# Altium PCB Copy of BQ76952_test_board.PcbDoc
Units mm, origin at the board's own origin, x right, y up, seen from the top; angles counter-clockwise.
Board outline 66.75 x 70 mm, 2 copper layers (Top Layer, Bottom Layer), stack 1.571 mm thick; 79 components, 70 nets, 228 pads, 109 vias.
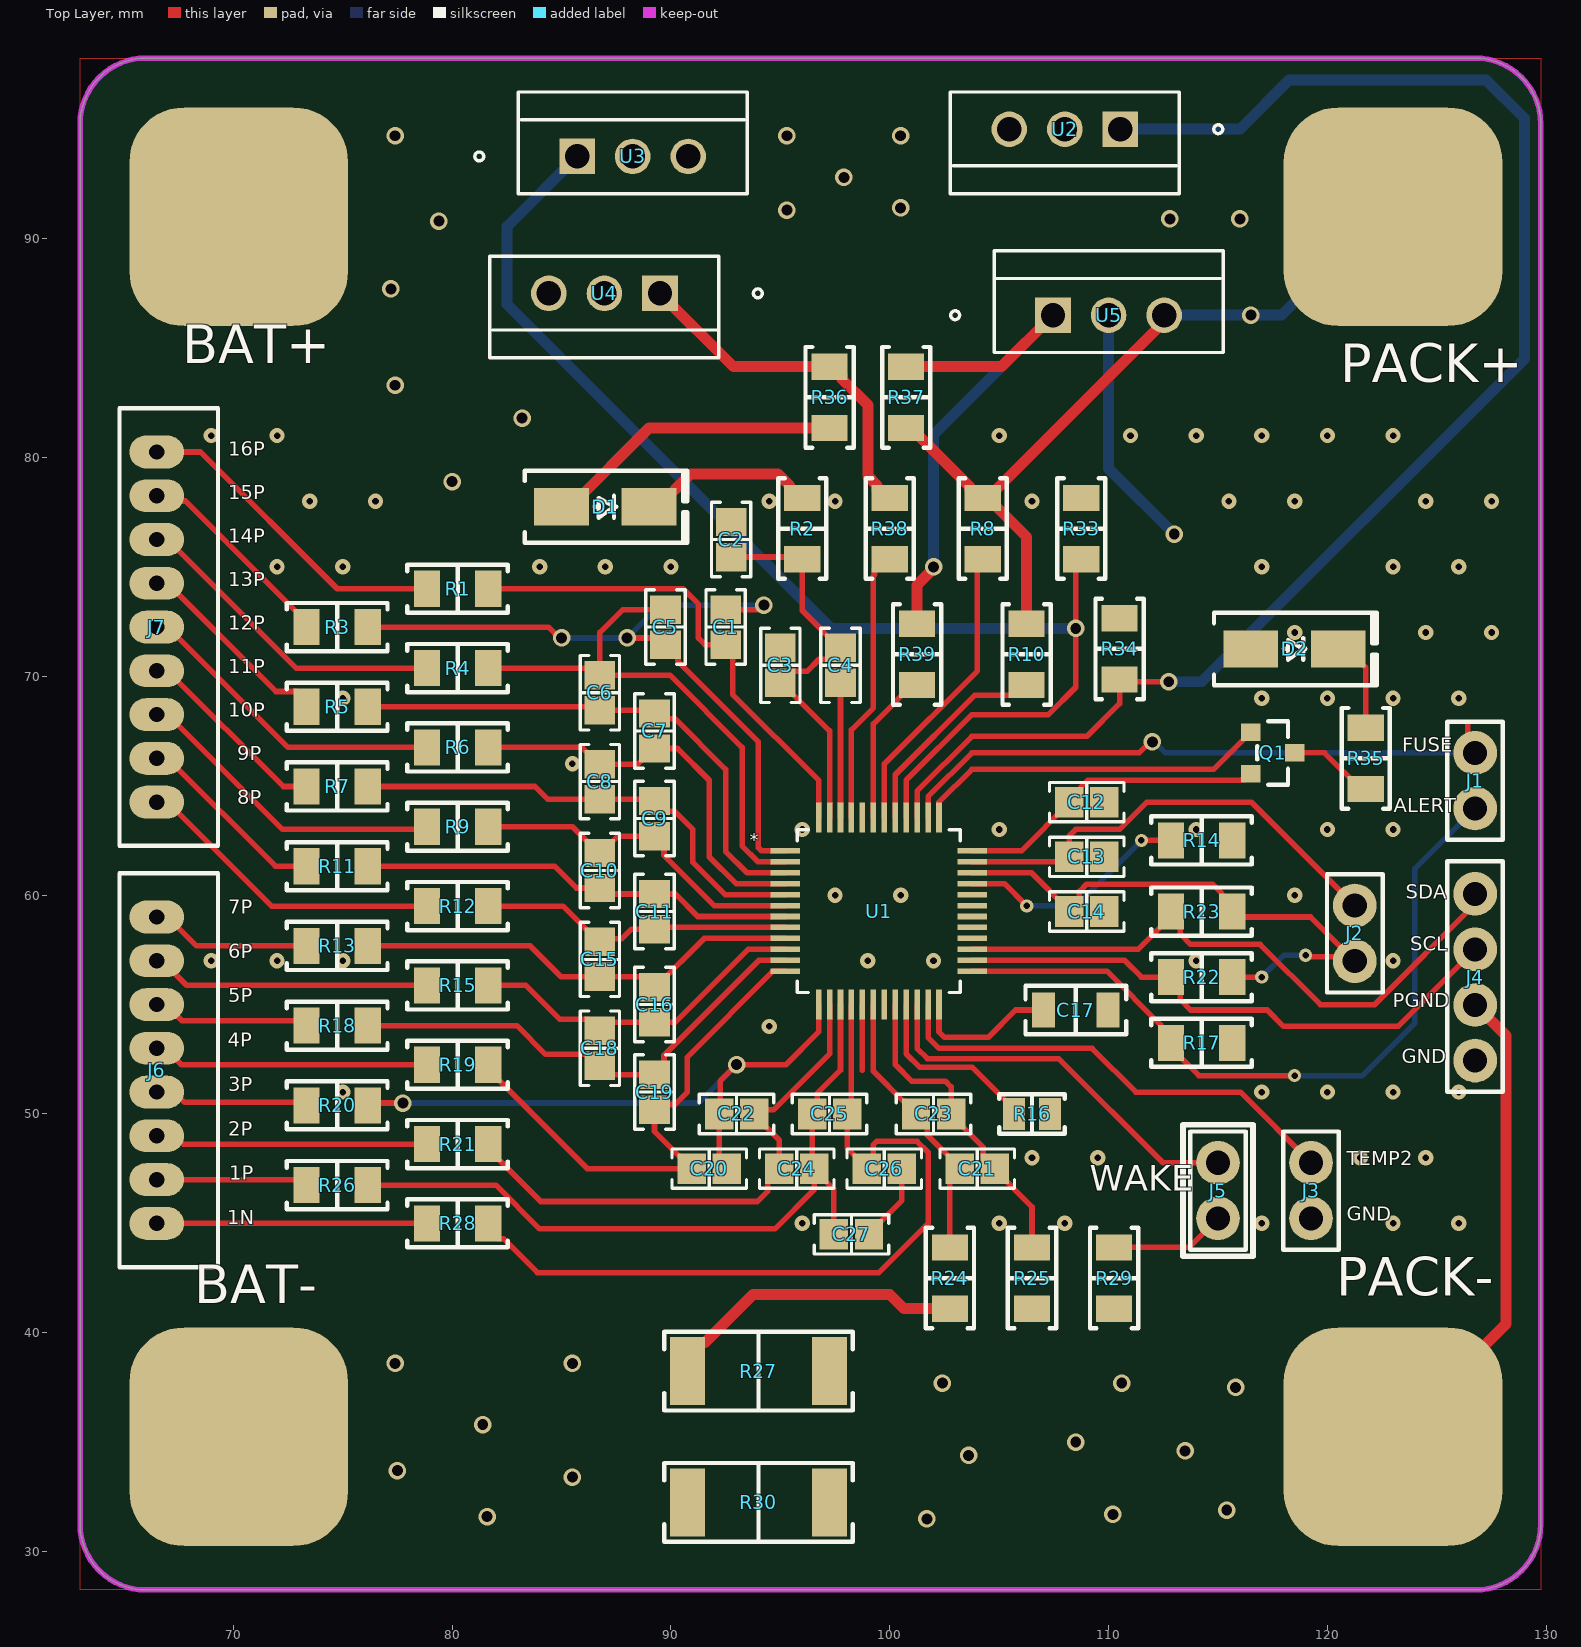
[diagram p0: Top Layer view]
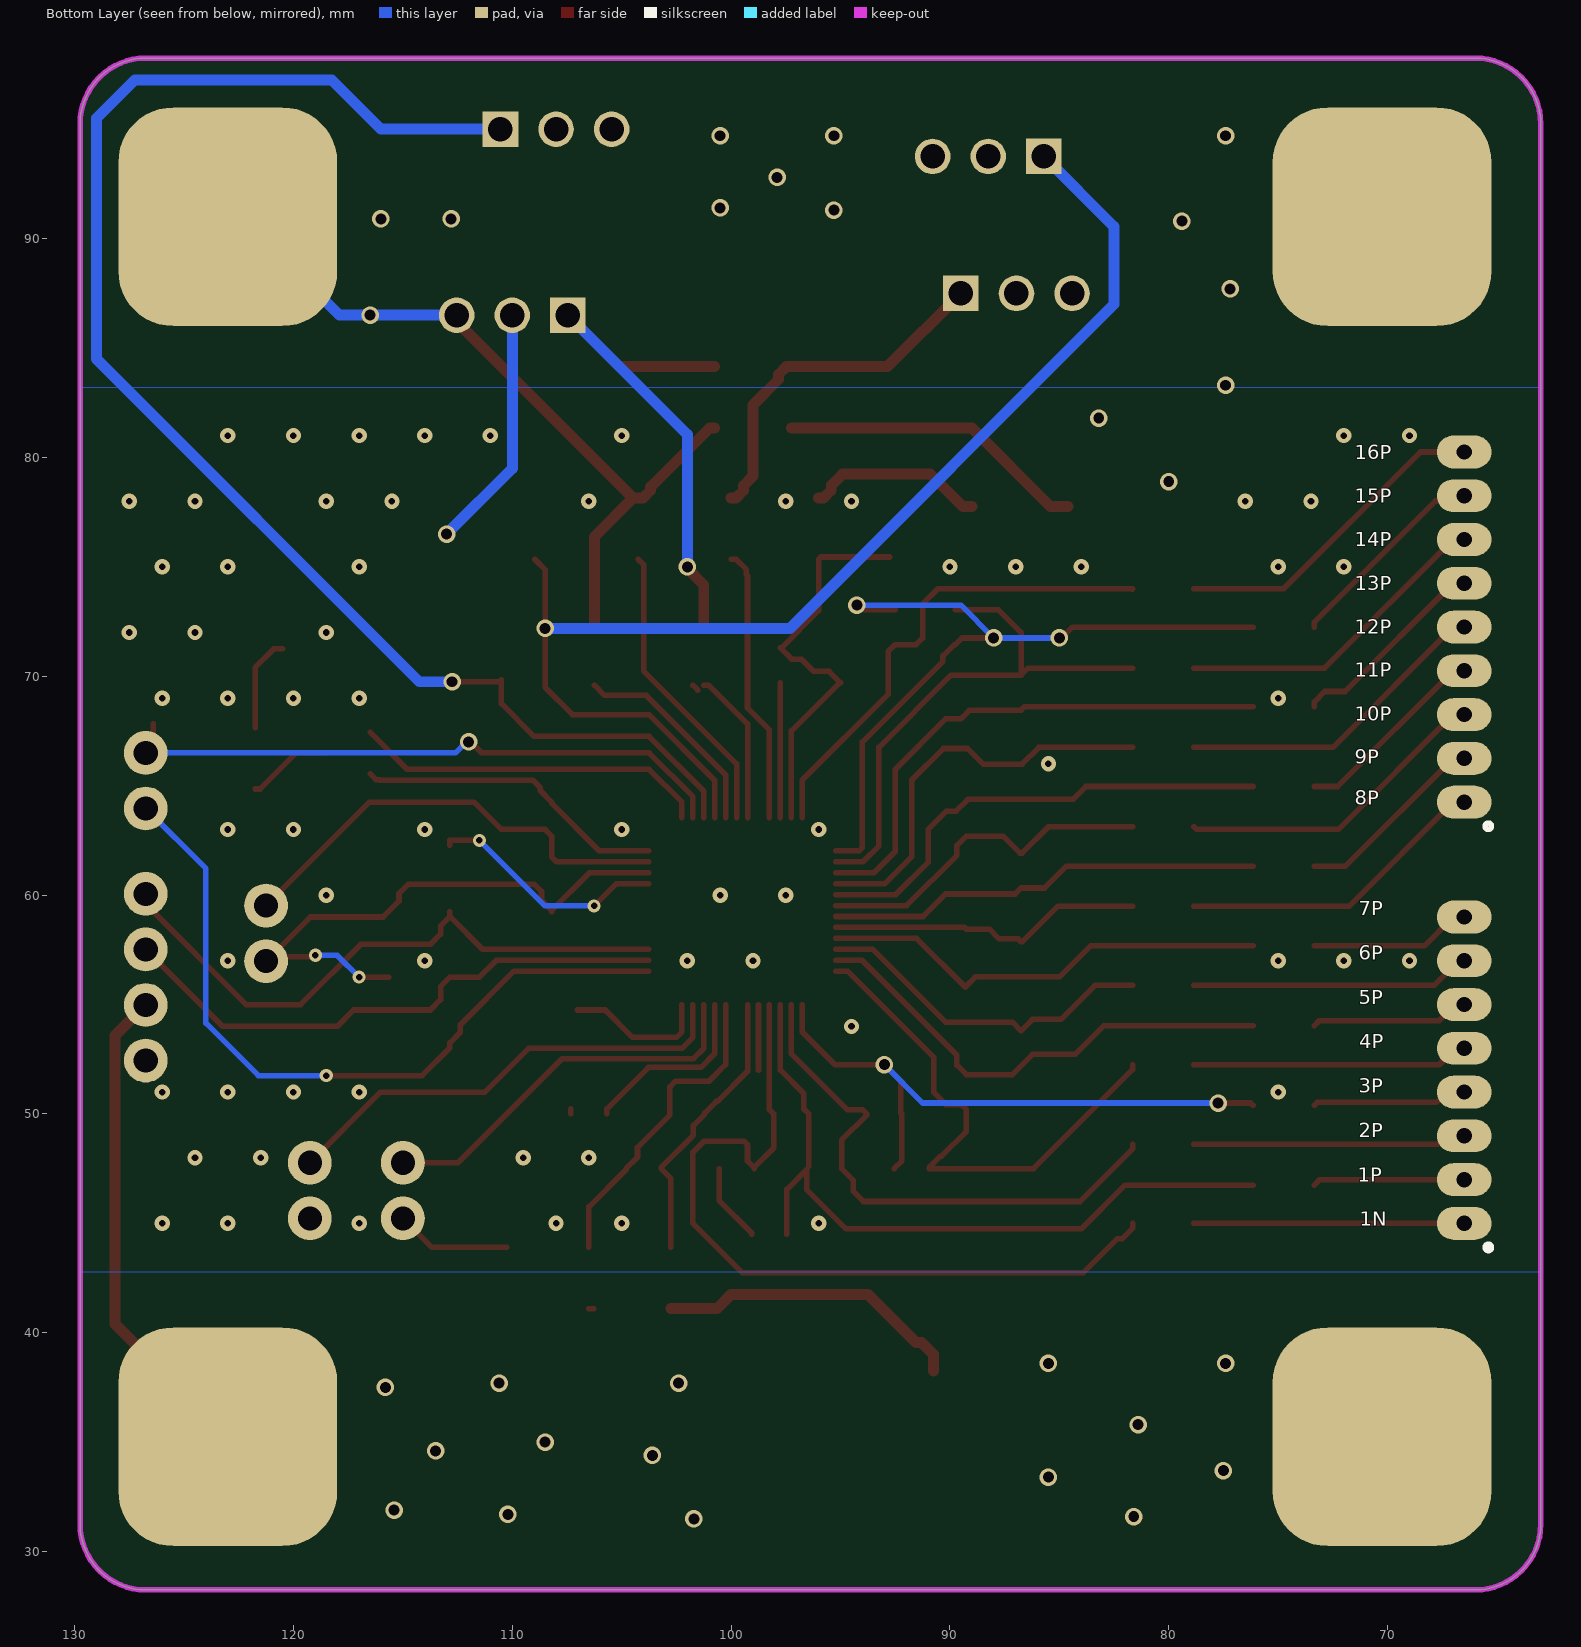
[diagram p1: Bottom Layer view, seen from below]

## Layer stack, top to bottom
Top Solder: solder mask 0.0102, Solder Resist, Dk 3.5
Top Layer: signal copper 0.0356
Dielectric 1: dielectric 1.5, FR-4, Dk 4.8
Bottom Layer: signal copper 0.0356
Bottom Solder: solder mask 0.0102, Solder Resist, Dk 3.5

## Board outline
63,31.25 63,95.25 cw(c66,95.25) 66,98.25 126.75,98.25 cw(c126.75,95.25) 129.75,95.25 129.75,31.25 cw(c126.75,31.25) 126.75,28.25 66,28.25 cw(c66,31.25)

## Design rules (kind name [scope] priority, off if disabled: settings)
AssemblyTestPointUsage [All] p0: scope1count=1 scope1_0_kind=Board scope1_0_value=Board scope2count=1 scope2_0_kind=Board scope2_0_value=Board commentlength=0
AssemblyTestpoint [All] p0: scope1count=1 scope1_0_kind=Board scope1_0_value=Board scope2count=1 scope2_0_kind=Board scope2_0_value=Board commentlength=0
Clearance [All] p0: scope1count=1 scope1_0_kind=Board scope1_0_value=Board scope2count=1 scope2_0_kind=Board scope2_0_value=Board commentlength=0 gap=0.152
Clearance [All] p1: gap=0.152 ignorepadtopadclearanceinfootprint=FALSE
ComponentClearance [All] p0: scope1count=1 scope1_0_kind=Board scope1_0_value=Board scope2count=1 scope2_0_kind=Board scope2_0_value=Board commentlength=0 gap=0.254 collisioncheckmode=3
DiffPairsRouting [All] p0: scope1count=1 scope1_0_kind=Board scope1_0_value=Board scope2count=1 scope2_0_kind=Board scope2_0_value=Board commentlength=0
FabricationTestPointUsage [All] p0: scope1count=1 scope1_0_kind=Board scope1_0_value=Board scope2count=1 scope2_0_kind=Board scope2_0_value=Board commentlength=0 valid=0 allowmultiple=FALSE
FabricationTestpoint [All] p0: scope1count=1 scope1_0_kind=Board scope1_0_value=Board scope2count=1 scope2_0_kind=Board scope2_0_value=Board commentlength=0 side=3 testpointundercomponent=TRUE minsize=1.016 maxsize=2.54 preferedsize=1.524 minholesize=0 maxholesize=1.016 preferedholesize=0.813 testpointgrid=0.025
FanoutControl Fanout_BGA [All] p0 off: scope1count=1 scope1_0_kind=Board scope1_0_value=Board scope2count=1 scope2_0_kind=Board scope2_0_value=Board commentlength=69 // Protel DXP Scope 1 Expression Was: IsBGA   Fanout_BGA (Default Rule)
FanoutControl Fanout_LCC [All] p0 off: scope1count=1 scope1_0_kind=Board scope1_0_value=Board scope2count=1 scope2_0_kind=Board scope2_0_value=Board commentlength=69 // Protel DXP Scope 1 Expression Was: IsLCC   Fanout_LCC (Default Rule)
FanoutControl Fanout_SOIC [All] p0 off: scope1count=1 scope1_0_kind=Board scope1_0_value=Board scope2count=1 scope2_0_kind=Board scope2_0_value=Board commentlength=71 // Protel DXP Scope 1 Expression Was: IsSOIC   Fanout_SOIC (Default Rule)
FanoutControl Fanout_Small [All] p0 off: scope1count=1 scope1_0_kind=Board scope1_0_value=Board scope2count=1 scope2_0_kind=Board scope2_0_value=Board commentlength=84 // Protel DXP Scope 1 Expression Was: (CompPinCount < 5)   Fanout_Small (Default Rule)
FanoutControl Fanout_Default [All] p0: scope1count=1 scope1_0_kind=Board scope1_0_value=Board scope2count=1 scope2_0_kind=Board scope2_0_value=Board commentlength=30 // Fanout_Default (Default Rule)
Height [All] p0: scope1count=1 scope1_0_kind=Board scope1_0_value=Board scope2count=1 scope2_0_kind=Board scope2_0_value=Board commentlength=0
HoleSize [All] p0: scope1count=1 scope1_0_kind=Board scope1_0_value=Board scope2count=1 scope2_0_kind=Board scope2_0_value=Board commentlength=0 absolutevalues=TRUE maxlimit=2.54 minlimit=0.025 maxpercent=80.000 minpercent=20.000
HoleToHoleClearance [All] p0: scope1count=1 scope1_0_kind=Board scope1_0_value=Board scope2count=1 scope2_0_kind=Board scope2_0_value=Board commentlength=0
LayerPairs [All] p0: scope1count=1 scope1_0_kind=Board scope1_0_value=Board scope2count=1 scope2_0_kind=Board scope2_0_value=Board commentlength=0 enforce=TRUE
MinimumSolderMaskSliver [All] p0: scope1count=1 scope1_0_kind=Board scope1_0_value=Board scope2count=1 scope2_0_kind=Board scope2_0_value=Board commentlength=0
NetAntennae [All] p0: scope1count=1 scope1_0_kind=Board scope1_0_value=Board scope2count=1 scope2_0_kind=Board scope2_0_value=Board commentlength=0
PasteMaskExpansion [All] p0: scope1count=1 scope1_0_kind=Board scope1_0_value=Board scope2count=1 scope2_0_kind=Board scope2_0_value=Board commentlength=0 expansion=0
PlaneClearance [All] p0: scope1count=1 scope1_0_kind=Board scope1_0_value=Board scope2count=1 scope2_0_kind=Board scope2_0_value=Board commentlength=0 clearance=0.508
PlaneConnect [All] p0: scope1count=1 scope1_0_kind=Board scope1_0_value=Board scope2count=1 scope2_0_kind=Board scope2_0_value=Board commentlength=0 planeconnectstyle=Relief reliefexpansion=0.508 reliefentries=4 reliefconductorwidth=0.254 reliefairgap=0.254
PolygonConnect [All] p0: scope1count=1 scope1_0_kind=Board scope1_0_value=Board scope2count=1 scope2_0_kind=Board scope2_0_value=Board commentlength=0 connectstyle=Relief reliefconductorwidth=0.254 reliefentries=4 polygonreliefangle="90 Angle"
PolygonConnect [All] p1: connectstyle=Relief reliefconductorwidth=0.254 reliefentries=4 polygonreliefangle="90 Angle" airgapwidth=0.254
RoutingCorners [All] p0: scope1count=1 scope1_0_kind=Board scope1_0_value=Board scope2count=1 scope2_0_kind=Board scope2_0_value=Board commentlength=0 cornerstyle=45-Degree minsetback=2.54 maxsetback=2.54
RoutingLayers [All] p0: scope1count=1 scope1_0_kind=Board scope1_0_value=Board scope2count=1 scope2_0_kind=Board scope2_0_value=Board commentlength=0 top layer=Automatic bottom layer=Automatic
RoutingPriority [All] p0: scope1count=1 scope1_0_kind=Board scope1_0_value=Board scope2count=1 scope2_0_kind=Board scope2_0_value=Board commentlength=0
RoutingTopology [All] p0: scope1count=1 scope1_0_kind=Board scope1_0_value=Board scope2count=1 scope2_0_kind=Board scope2_0_value=Board commentlength=0 topology=Shortest
RoutingVias [All] p0: scope1count=1 scope1_0_kind=Board scope1_0_value=Board scope2count=1 scope2_0_kind=Board scope2_0_value=Board commentlength=0 holewidth=0.3 width=0.6 viastyle="Through Hole" minholewidth=0.3 minwidth=0.4 maxholewidth=1.2 maxwidth=1.2
RoutingVias [All] p1: holewidth=0.3 width=0.6 viastyle="Through Hole" minholewidth=0.3 minwidth=0.4 maxholewidth=1.2 maxwidth=1.2
ShortCircuit [All] p0: scope1count=1 scope1_0_kind=Board scope1_0_value=Board scope2count=1 scope2_0_kind=Board scope2_0_value=Board commentlength=0 allowed=FALSE
SilkToBoardRegionClearance [All] p0: scope1count=1 scope1_0_kind=Board scope1_0_value=Board scope2count=1 scope2_0_kind=Board scope2_0_value=Board commentlength=0
SilkToSilkClearance [All] p0: scope1count=1 scope1_0_kind=Board scope1_0_value=Board scope2count=1 scope2_0_kind=Board scope2_0_value=Board commentlength=0
SilkToSolderMaskClearance [All] p0 off: scope1count=1 scope1_0_kind=Board scope1_0_value=Board scope2count=1 scope2_0_kind=Board scope2_0_value=Board commentlength=44 // Protel DXP Scope 1 Expression Was: IsPad
SolderMaskExpansion [All] p0: scope1count=1 scope1_0_kind=Board scope1_0_value=Board scope2count=1 scope2_0_kind=Board scope2_0_value=Board commentlength=0 expansion=0.102
SolderMaskExpansion [All] p1: expansion=0.102 istentingtop=FALSE
SupplyNets "Schematic Supply Nets_1" [All] p0: scope1count=1 scope1_0_kind=Net scope1_0_value=PGND scope2count=1 scope2_0_kind=Board scope2_0_value=Board commentlength=0 voltage=0.000
SupplyNets "Schematic Supply Nets" [All] p0: scope1count=1 scope1_0_kind=Net scope1_0_value=GND scope2count=1 scope2_0_kind=Board scope2_0_value=Board commentlength=0 voltage=0.000
SupplyNets "Schematic Supply Nets_1" [InNet('PGND')] p1: voltage=0.000
SupplyNets "Schematic Supply Nets" [InNet('GND')] p2: voltage=0.000
UnRoutedNet [All] p0: scope1count=1 scope1_0_kind=Board scope1_0_value=Board scope2count=1 scope2_0_kind=Board scope2_0_value=Board commentlength=0
UnpouredPolygon [All] p0: scope1count=1 scope1_0_kind=Board scope1_0_value=Board scope2count=1 scope2_0_kind=Board scope2_0_value=Board commentlength=0
Width [All] p0: scope1count=1 scope1_0_kind=Board scope1_0_value=Board scope2count=1 scope2_0_kind=Board scope2_0_value=Board commentlength=0 maxlimit=1.27 minlimit=0.152 preferedwidth=0.254
Width [All] p1: maxlimit=1.27 minlimit=0.152 preferedwidth=0.254
30 further rules are at their usual default settings.

## Classes and differential pairs
component class Nmos: J7 PACK- U2 U3 U4 U5
component class BQ76952_monitor: C9 PACK- R19 R22 R24

## Components (designator, comment, footprint, x,y, rotation, side; value= is the part's Value field where it differs from the comment)
C1 "0.22µF" "CAP 0805_2012" 92.5,72.25 r270 top
C2 "1 µF" "CAP 0805_2012" 92.75,76.25 r270 top
C3 "100 pF" "CAP 0805_2012" 95,70.5 r270 top
C4 "1 µF" "CAP 0805_2012" 97.75,70.5 r90 top
C5 "0.22µF" "CAP 0805_2012" 89.75,72.25 r270 top
C6 "0.22µF" "CAP 0805_2012" 86.75,69.25 r90 top
C7 "0.22µF" "CAP 0805_2012" 89.25,67.5 r90 top
C8 "0.22µF" "CAP 0805_2012" 86.75,65.187 r90 top
C9 "0.22µF" "CAP 0805_2012" 89.25,63.5 r90 top
C10 "0.22µF" "CAP 0805_2012" 86.75,61.125 r90 top
C11 "0.22µF" "CAP 0805_2012" 89.25,59.25 r90 top
C12 "0.022µF" "CAP 0805_2012" 109,64.25 r180 top
C13 "1 µF" "CAP 0805_2012" 109,61.75 r180 top
C14 "1 µF" "CAP 0805_2012" 109,59.25 r180 top
C15 "0.22µF" "CAP 0805_2012" 86.75,57.062 r90 top
C16 "0.22µF" "CAP 0805_2012" 89.25,55 r90 top
C17 "GRM31MR71E225KA93L" "MURATA CAP GRM31M 1206_3216" 108.5,54.75 r180 top
C18 "0.22µF" "CAP 0805_2012" 86.75,53 r90 top
C19 "0.22µF" "CAP 0805_2012" 89.25,51 r90 top
C20 "0.22µF" "CAP 0805_2012" 91.75,47.5 r180 top
C21 "1 µF" "CAP 0805_2012" 104,47.5 r180 top
C22 "0.22µF" "CAP 0805_2012" 93,50 r180 top
C23 "100 pF" "CAP 0805_2012" 102,50 r180 top
C24 "0.22µF" "CAP 0805_2012" 95.75,47.5 r180 top
C25 "0.22µF" "CAP 0805_2012" 97.25,50 r180 top
C26 "0.22µF" "CAP 0805_2012" 99.75,47.5 r180 top
C27 "0.22µF" "CAP 0805_2012" 98.25,44.5 r180 top
D1 "SZ1SMA26AT3G" "DO214AC SMA" 87,77.75 r0 top
D2 "SZ1SMA26AT3G" "DO214AC SMA" 118.5,71.25 r0 top
J1 "M20-7820242" "HARWIN M20-7820245" 126.75,65.23 r180 top
J2 "M20-7820242" "HARWIN M20-7820245" 121.25,58.25 r0 top
J3 "M20-7820242" "HARWIN M20-7820245" 119.25,46.5 r180 top
J4 "M20-7820442" "HARWIN M20-7820445" 126.75,56.25 r180 top
J5 "M20-7820242" "HARWIN M20-7820245" 115,46.5 r0 top
J6 "B8B-PH-K-S(LF)(SN)" "JST B8B-PH-K" 66.5,52 r90 top
J7 "B9B-PH-K-S(LF)(SN)" "JST B9B-PH-K" 66.5,72.25 r90 top
Q1 "ZXTN25100BFHTA" "DIODES SOT-23-3" 117.5,66.5 r0 top
R1 "20 Ohms" "RES 1206_3216" 80.25,74 r0 top
R2 "100 Ohms" "RES 1206_3216" 96,76.75 r270 top
R3 "20 Ohms" "RES 1206_3216" 74.75,72.25 r0 top
R4 "20 Ohms" "RES 1206_3216" 80.25,70.375 r0 top
R5 "20 Ohms" "RES 1206_3216" 74.75,68.607 r0 top
R6 "20 Ohms" "RES 1206_3216" 80.25,66.75 r0 top
R7 "20 Ohms" "RES 1206_3216" 74.75,64.964 r0 top
R8 "10 kOhms" "RES 1206_3216" 104.25,76.75 r270 top
R9 "20 Ohms" "RES 1206_3216" 80.25,63.125 r0 top
R10 "10 kOhms" "RES 1206_3216" 106.25,71 r270 top
R11 "20 Ohms" "RES 1206_3216" 74.75,61.321 r0 top
R12 "20 Ohms" "RES 1206_3216" 80.25,59.5 r0 top
R13 "20 Ohms" "RES 1206_3216" 74.75,57.679 r0 top
R14 "10 kOhms" "RES 1206_3216" 114.25,62.5 r0 top
R15 "20 Ohms" "RES 1206_3216" 80.25,55.875 r0 top
R16 "20k" "NTC 0805_2012" 106.5,50 r180 top
R17 "1 kOhms" "RES 1206_3216" 114.25,53.25 r180 top
R18 "20 Ohms" "RES 1206_3216" 74.75,54.036 r0 top
R19 "20 Ohms" "RES 1206_3216" 80.25,52.25 r0 top
R20 "20 Ohms" "RES 1206_3216" 74.75,50.393 r0 top
R21 "20 Ohms" "RES 1206_3216" 80.25,48.625 r0 top
R22 "10 kOhms" "RES 1206_3216" 114.25,56.25 r0 top
R23 "10 kOhms" "RES 1206_3216" 114.25,59.25 r0 top
R24 "100 Ohms" "RES 1206_3216" 102.75,42.5 r90 top
R25 "100 Ohms" "RES 1206_3216" 106.5,42.5 r90 top
R26 "20 Ohms" "RES 1206_3216" 74.75,46.75 r0 top
R27 "330 Ohms" "STACKPOLE CSR2512" 94,38.25 r180 top
R28 "20 Ohms" "RES 1206_3216" 80.25,45 r0 top
R29 "10 kOhms" "RES 1206_3216" 110.25,42.5 r90 top
R30 "330 Ohms" "STACKPOLE CSR2512" 94,32.25 r180 top
R33 "15 mOhms" "RES 1206_3216" 108.75,76.75 r90 top
R34 "15 mOhms" "RES 1206_3216" 110.5,71.25 r90 top
R35 "100 Ohms" "RES 1206_3216" 121.75,66.25 r90 top
R36 "15 mOhms" "RES 1206_3216" 97.25,82.75 r270 top
R37 "15 mOhms" "RES 1206_3216" 100.75,82.75 r270 top
R38 "1 kOhms" "RES 1206_3216" 100,76.75 r90 top
R39 "1 kOhms" "RES 1206_3216" 101.25,71 r90 top
U1 "BQ76952PFBR" QFP_2PFBR_TEX 99.499,59.274 r0 top
U2 "IRLZ44NPBF" PG-TO220-3_INF 110.54,95 r180 top
U3 "IRLZ44NPBF" PG-TO220-3_INF 85.71,93.755 r0 top
U4 "IRLZ44NPBF" PG-TO220-3_INF 89.5,87.5 r180 top
U5 "IRLZ44NPBF" PG-TO220-3_INF 107.46,86.5 r0 top

## Footprints (in the part's own frame and the unit in brackets; to place one, negate y for a bottom-side part, rotate by r counter-clockwise, add the part's x,y. Pads: shape width x height; smd on the part's side, far side on the other; paste and mask are expansions set on the pad)
"CAP 0805_2012" [mm] "Chip Capacitor, 2-Leads, Body 2.00x1.20mm, IPC Medium Density"
  rect 1.3x1.4 smd: 1(-0.8,0) 2(0.8,0)
  silkscreen extent -1.7,-0.9 1.7,0.9
"DIODES SOT-23-3" [mm] "SOT23, 3-Leads, Body 2.90x2.40mm, Pitch 0.95mm, IPC Medium Density"
  rect 0.9x0.8 smd: 1(-1,0.95) 2(-1,-0.95) 3(1,0)
  silkscreen extent -0.7,-1.45 0.7,1.45
"DO214AC SMA" [mm] "Molded Diode, 2-Leads, Body 4.30x2.60mm, IPC Medium Density"
  rect 2.5x1.7 smd: 1(-2,0) 2(2,0)
  silkscreen extent -3.68,-1.65 3.75,1.65
"HARWIN M20-7820245" [mm] "2.54mm DIL PC TAIL PIN HEADER ASSEMBLY"
  round 2 hole 1.1: 1(0,1.27) 2(0,-1.27)
  silkscreen extent -1.27,-2.7 1.27,2.7
"HARWIN M20-7820445" [mm] "2.54mm DIL PC TAIL PIN HEADER ASSEMBLY"
  round 2 hole 1.1: 1(0,3.81) 2(0,1.27) 3(0,-1.27) 4(0,-3.81)
  silkscreen extent -1.27,-5.3 1.27,5.24
"JST B8B-PH-K" [mm]
  oval 1.5x2.5 hole 0.7: 1(-7,0) 2(-5,0) 3(-3,0) 4(-1,0) 5(1,0) 6(3,0) 7(5,0) 8(7,0)
  silkscreen extent -9,-2.8 9,1.7
"JST B9B-PH-K" [mm]
  oval 1.5x2.5 hole 0.7: 1(-8,0) 2(-6,0) 3(-4,0) 4(-2,0) 5(0,0) 6(2,0) 7(4,0) 8(6,0) 9(8,0)
  silkscreen extent -10,-2.8 10,1.7
"MURATA CAP GRM31M 1206_3216" [mm] "Chip Capacitor, 2-Leads, Body 3.25x1.60mm"
  rect 1.05x1.6 smd: 1(-1.475,0) 2(1.475,0)
  silkscreen extent -2.3,-1.1 2.3,1.1
"NTC 0805_2012" [mm] "Chip Thermistor, 2-Leads, Body 2.00x1.25mm, IPC Medium Density"
  rect 1x1.45 smd: 1(-0.825,0) 2(0.825,0)
  silkscreen extent -1.5,-0.9 1.5,0.9
PG-TO220-3_INF [mil]
  rect 64x64 / inner round 60 / far side rect 64x64 hole 44 paste+0 mask+0: 1(0,0)
  round 64 / inner round 60 / far side round 64 hole 44 paste+0 mask+0: 2(100,0) 3(200,0)
  silkscreen extent -184,-67 306,116
QFP_2PFBR_TEX [mil]
  rect 53.5x10 smd paste+0 mask+0: 1(-168.25,108.3) 2(-168.25,88.61) 3(-168.25,68.91) 4(-168.25,49.22) 5(-168.25,29.53) 6(-168.25,9.85) 7(-168.25,-9.84) 8(-168.25,-29.53) 9(-168.25,-49.22) 10(-168.25,-68.91) 11(-168.25,-88.61) 12(-168.25,-108.3) 25(168.25,-108.3) 26(168.25,-88.61) 27(168.25,-68.91) 28(168.25,-49.22) 29(168.25,-29.53) 30(168.25,-9.84) 31(168.25,9.85) 32(168.25,29.53) 33(168.25,49.22) 34(168.25,68.91) 35(168.25,88.61) 36(168.25,108.3)
  rect 10x53.5 smd paste+0 mask+0: 13(-108.3,-168.25) 14(-88.61,-168.25) 15(-68.91,-168.25) 16(-49.22,-168.25) 17(-29.53,-168.25) 18(-9.84,-168.25) 19(9.85,-168.25) 20(29.53,-168.25) 21(49.22,-168.25) 22(68.91,-168.25) 23(88.61,-168.25) 24(108.3,-168.25) 37(108.3,168.25) 38(88.61,168.25) 39(68.91,168.25) 40(49.22,168.25) 41(29.53,168.25) 42(9.85,168.25) 43(-9.84,168.25) 44(-29.53,168.25) 45(-49.22,168.25) 46(-68.91,168.25) 47(-88.61,168.25) 48(-108.3,168.25)
  silkscreen extent -146,-146 146,146
"RES 1206_3216" [mm] "Chip Resistor, 2-Leads, Body 3.13x1.55mm, IPC Medium Density"
  rect 1.2x1.65 smd: 1(-1.4,0) 2(1.4,0)
  silkscreen extent -2.3,-1.1 2.3,1.1
"STACKPOLE CSR2512" [mm] "Chip Resistor, 2-Leads, Body 6.40x3.20mm, IPC Medium Density"
  rect 1.6x3.1 smd: 1(-3.25,0) 2(3.25,0)
  silkscreen extent -4.3,-1.8 4.3,1.8

## Part data
C1 C5 C6 C7 C8 C9 C10 C11 C15 C16 C18 C19 C20 C22 C24 C25 C26 C27: library part 0805YC224KAT2A, "CAP CER 0.22UF 16V X7R 0805"
C2 C4 C21: library part HMR212CC7105KG-T, "CAP MLCC 1UF 10% 100V X7S 0805"
C3 C23: library part CL21C101JC61PNC, "CAP CER 100PF 100V C0G/NP0 0805"
C12: library part 08051C223K4T2A, "CAP CER 0.022UF 100V X7R 0805"
C13 C14: library part C0805C105M4VAC7800, "CAP CER 1UF 16V Y5V 0805"
C17: "CAP CER 2.2UF 25V X7R 1206"
D1 D2: "TVS DIODE 26VWM 42.1VC SMA"
J1 J2 J3 J5: "CONN RCPT 2POS 0.1 GOLD PCB"
J4: "CONN RCPT 4POS 0.1 GOLD PCB"
J6: "CONN HEADER VERT 8POS 2MM"
J7: "CONN HEADER VERT 9POS 2MM"
Q1: "TRANS NPN 100V 3A SOT23-3"
R1 R3 R4 R5 R6 R7 R9 R11 R12 R13 R15 R18 R19 R20 R21 R26 R28: library part ESR18EZPF20R0, "RES SMD 20 OHM 1% 1/2W 1206"
R2 R24 R25 R35: library part RNCS1206BKE100R, "RES 100 OHM 0.1% 1/8W 1206"
R8 R10 R14 R22 R23 R29: library part ERA-8ARB103V, "RES SMD 10K OHM 0.1% 1/4W 1206"
R16: library part NHQM203B400T5, "THERMISTOR NTC 20KOHM 4000K 0805"
R17: library part ERJ-8GEYJ102V, "RES SMD 1K OHM 5% 1/4W 1206"
R27 R30: library part CRM2512-FX-3300ELF, "RES SMD 330 OHM 1% 2W 2512"
R33 R34 R36 R37: library part TLR2BPDTD15L0F75, "RES 15M OHM 1% 1.5W 1206"
R38 R39: library part CRGCQ1206F1K0, "RES 1K OHM 1% 1/4W 1206"
U1 U2 U3 U4 U5: "No Description Available"

## Free pads (board coordinates)
  rrect50% 10x10 all layers, no hole: 26(70.25,35.25) 26(70.25,91) 26(123,35.25) 26(123,91)

## Via types
v1: diameter 0.7, hole 0.3, Top Layer to Bottom Layer, tented both sides, 65 vias
v2: diameter 0.8, hole 0.5, Top Layer to Bottom Layer, tented both sides, 39 vias
v3: diameter 0.6, hole 0.3, Top Layer to Bottom Layer, tented both sides, 5 vias

## Nets (pads, with @x,y where several pads share a name; then routed paths per layer and width w, separated by ;. In a path a pad name is that pad's centre, name@x,y a point inside that pad or via, vN(x,y) a via of type N, cw(c..) or ccw(c..) an arc to the next point about the centre after c; other vN are vias at no path point)
1N: J6.1 R28.1 | length 12.4
  Top Layer w0.254: J6.1 R28.1
1P: J6.2 R26.1 | length 7
  Top Layer w0.254: J6.2 73.1,47 R26.1
2P: J6.3 R21.1 | length 12.5
  Top Layer w0.254: J6.3 67.337,49 67.712,48.625 R21.1
3P: J6.4 R20.1 | length 7.1
  Top Layer w0.254: J6.4 67.299,51 67.772,50.527 73.216,50.527 R20.1
4P: J6.5 R19.1 | length 12.7
  Top Layer w0.254: J6.5 66.889,53 67.639,52.25 R19.1
5P: J6.6 R18.1 | length 7.2
  Top Layer w0.254: J6.6 66.91,55 67.65,54.261 73.125,54.261 R18.1
6P: J6.7 R15.1 | length 12.8
  Top Layer w0.254: J6.7 66.75,57 67.875,55.875 R15.1
7P: J6.8 R13.1 | length 7.4
  Top Layer w0.254: J6.8 67,59 68.321,57.679 R13.1
8P: J7.1 R12.1 | length 14.3
  Top Layer w0.254: J7.1 67,64.25 71.75,59.5 R12.1
9P: J7.2 R11.1 | length 8.9
  Top Layer w0.254: J7.2 67,66.25 71.929,61.321 R11.1
10P: J7.3 R9.1 | length 14.6
  Top Layer w0.254: J7.3 67,68.25 72.25,63 78.725,63 R9.1
11P: J7.4 R7.1 | length 9
  Top Layer w0.254: J7.4 67,70.25 72.286,64.964 R7.1
12P: J7.5 R6.1 | length 14.6
  Top Layer w0.254: J7.5 67,72.25 72.5,66.75 R6.1
13P: J7.6 R5.1 | length 9.3
  Top Layer w0.254: J7.6 67,74.25 71.945,69.305 72.877,69.305 73.35,68.832 R5.1
14P: J7.7 R4.1 | length 14.8
  Top Layer w0.254: J7.7 67,76.25 72.875,70.375 R4.1
15P: J7.8 R3.1 | length 9.5
  Top Layer w0.254: J7.8 66.738,78.012 67.813,78.012 73.35,72.475 R3.1
16P: J7.9 R1.1 | length 14.9
  Top Layer w0.254: J7.9 68.5,80.25 74.75,74 R1.1
ALERT: J1.1 R17.2 U1.25 | length 34.5
  Top Layer w0.254: U1.25 109.922,56.523 112.377,54.068 112.377,53.723 R17.2 112.85,53.025 114.125,51.75 v3(118.5,51.75)
  Bottom Layer w0.254: v3(118.5,51.75) 121.601,51.75 124,54.149 124,61.21 J1.1
BAT: C2.2 C3.2 C4.2 R2.2 U1.47 | length 18.6
  Top Layer w0.254: C2.2 95.9,75.45 R2.2 96,73 97.7,71.3 C4.2 97.227,70.777 96.777,70.777 96.223,70.223 95.523,70.223 C3.2 95.05,69.7 97.249,67.501 U1.47
BAT+: D1.1 pad.26@70.25,91 R36.2 U3.2 U4.3 | length 14.4
  Top Layer w0.5: U4.3@84.42,87.195 U4.3 ; D1.1@84.6,77.75 D1.1 85.4,77.75 89,81.35 R36.2
  other v2: 80,78.9 83.2,81.8 77.4,83.3 77.2,87.7 79.4,90.8 77.4,94.7
BAT-: pad.26@70.25,35.25 R24.1 R27.2 R30.2 | length 14.2
  Top Layer w0.5: R27.2 90.75,39 91.3,39.55 91.55,39.55 93.75,41.75 100,41.75 100.65,41.1 R24.1
  other v2: 81.6,31.6 85.5,33.4 77.5,33.7 81.4,35.8 77.4,38.6 85.5,38.6
BREG: Q1.1 U1.37 | length 16.3
  Top Layer w0.254: U1.37 102.25,64.25 103.75,65.75 114.8,65.75 Q1.1
CD: D2.1 R33.2 R34.2 U2.3 U3.3 U4.2 U5.2 | length 11.2
  Bottom Layer w0.5: U5.2 110,79.5 v2(113,76.5)
  other v2: 95.3,91.3 100.5,91.4 97.9,92.8 95.3,94.7 100.5,94.7
CHG: R38.1 U1.45 | length 12.7
  Top Layer w0.254: U1.45 98.249,67.549 99.25,68.55 99.25,74.6 99.302,74.652 99.302,74.877 99.775,75.35 R38.1
CP1: C4.1 U1.46 | length 6.2
  Top Layer w0.254: U1.46 97.749,69.699 C4.1
DSG: R39.1 U1.43 | length 7.3
  Top Layer w0.254: U1.43 99.249,67.824 101.025,69.6 R39.1 ; R39.1@101.518,69.368 R39.1@101.75,69.6
FUSE: J1.2 U1.38 | length 28.7
  Top Layer w0.254: U1.38 101.75,64.5 103.75,66.5 111.395,66.5 111.895,67 v2(112,67) ; 126.416,67.829 126.416,66.834 J1.2
  Bottom Layer w0.254: v2(112,67) 112.104,67 112.604,66.5 J1.2
GND: C2.1 C3.1 C12.1 C13.1 C14.1 C17.1 J3.1 J4.1 R14.2 R16.1 R17.1 R29.1 U1.17 U1.29 U1.30 | length 3.2
  Top Layer w0.254: 98.749,52.001 U1.17 ; R16.1 R16.1@107.325,50.225
  other v1: 96,45 105,45 108,45 117,45 123,45 126,45 106.5,48 109.5,48 121.5,48 124.5,48 75,51 117,51 120,51 123,51 126,51 94.5,54 69,57 72,57 75,57 99,57 102,57 114,57 123,57 97.5,60 100.5,60 118.5,60 96,63 105,63 114,63 120,63 123,63 85.5,66 75,69 117,69 120,69 123,69 126,69 118.5,72 124.5,72 127.5,72 72,75 75,75 84,75 87,75 90,75 117,75 123,75 126,75 73.5,78 76.5,78 94.5,78 97.5,78 106.5,78 115.5,78 118.5,78 124.5,78 127.5,78 69,81 72,81 105,81 111,81 114,81 117,81 120,81 123,81
NetC17_2: C17.2 U1.24 | length 6.6
  Top Layer w0.254: U1.24 102.25,53.75 102.5,53.5 104.5,53.5 105.75,54.75 C17.2
NetC26_1: C26.1 C27.1 | length 3.6
  Top Layer w0.254: C27.1 99.05,44.55 100.55,46.05 C26.1
NetD1_2: D1.2 R2.1 | length 8.2
  Top Layer w0.5: D1.2 89.4,77.75 90.9,79.25 94.9,79.25 95.425,78.725 95.425,78.5 95.775,78.15 R2.1
NetD2_2: D2.2 R35.2 | length 4.4
  Top Layer w0.254: D2.2 120.9,71.25 121.75,70.4 R35.2
NetJ5_2: J5.2 R29.2 | length 5.3
  Top Layer w0.254: R29.2 113.67,43.9 J5.2
NetQ1_3: Q1.3 R35.1 | length 3.9
  Top Layer w0.254: Q1.3 119.875,66.5 121.525,64.85 R35.1
NetR8_2: R8.2 U1.42 | length 13.7
  Top Layer w0.254: U1.42 99.749,65.999 104,70.25 104,75.1 R8.2
NetR10_2: R10.2 U1.41 | length 9.7
  Top Layer w0.254: U1.41 100.249,65.499 103.877,69.127 105.777,69.127 R10.2
NetR14_1: R14.1 U1.33 | length 11
  Top Layer w0.254: U1.33 105.244,60.524 v3(106.259,59.509) ; v3(111.5,62.5) R14.1 R14.1@112.85,62.275
  Bottom Layer w0.254: v3(106.259,59.509) 108.509,59.509 v3(111.5,62.5)
NetR36_1: R36.1 R38.2 U4.1 | length 16.5
  Top Layer w0.5: U4.1 92.85,84.15 R36.1 97.475,84.15 97.825,83.8 97.825,83.575 99,82.4 99,79.15 99.425,78.725 99.425,78.5 99.775,78.15 R38.2
NetR37_1: R37.1 R39.2 U5.1 | length 24.4
  Top Layer w0.5: R37.1 105.11,84.15 U5.1 ; R39.2 101.25,74.169 102,74.919 v2(102,75)
  Bottom Layer w0.5: v2(102,75) 102,81.04 U5.1
PACK+: pad.26@123,91 R8.1 R10.1 R37.2 U2.2 U5.3 | length 36.1
  Top Layer w0.5: R37.2 100.975,81.35 103.675,78.65 103.675,78.5 104.025,78.15 R8.1 R8.1@104.475,78.15 ; R10.1 106.25,76.375 R8.1@104.475,78.15 ; U2.2@108,94.75 U2.2 ; U5.3 U5.3@112.683,86.358 ; U5.3@112.755,86.285 U5.3@112.683,86.358 ; R8.1@104.475,78.15 U5.3@112.683,86.358
  Bottom Layer w0.5: U5.3 117.904,86.5 122.404,91 pad.26@123,91
  other v2: 116.5,86.5 112.8,90.9 116,90.9
PCHG: R33.1 U1.40 U3.1 | length 57.5
  Top Layer w0.254: U1.40 100.75,65.25 103.75,68.25 107.25,68.25 108.5,69.5 v2(108.5,72.188) 108.5,74.877 R33.1@108.973,75.35
  Bottom Layer w0.5: U3.1 82.5,90.545 82.5,87 97.312,72.188 v2(108.5,72.188)
PDSG: R34.1 U1.39 U2.1 | length 69
  Top Layer w0.254: U1.39 101.25,64.75 103.75,67.25 109,67.25 110.5,68.75 R34.1 110.6,69.75 v2(112.75,69.75) ; U2.1 U2.1@110.545,94.995
  Bottom Layer w0.5: U2.1 116,95 118.25,97.25 127.25,97.25 129,95.5 129,84.5 114.25,69.75 v2(112.75,69.75)
PGND: J4.2 pad.26@123,35.25 R25.1 R27.1 R30.1 | length 22.7
  Top Layer w0.254: R25.1@106.275,41.1 R25.1
  Top Layer w0.5: pad.26@123,35.25 128.152,40.402 128.152,53.578 J4.2
  other v2: 101.7,31.5 110.2,31.7 115.4,31.9 103.6,34.4 113.5,34.6 108.5,35 115.8,37.5 102.4,37.7 110.6,37.7
REG1: C13.2 J2.1 U1.35 | length 21.1
  Top Layer w0.254: U1.35 107.974,61.524 C13.2 108.2,62.7 108.5,63 110.5,63 111.75,64.25 116.52,64.25 J2.1
REG2: C14.2 J2.2 R22.2 R23.2 U1.34 | length 26.3
  Top Layer w0.254: U1.34 106.476,61.024 C14.2@108.2,59.3 ; C14.2 C14.2@108.2,59.3 ; R22.2 v3(117,56.25) ; v3(119,57.25) 119.066,57.184 120.443,57.184 120.73,57.47 J2.2@120.73,57.5 ; J2.2 J2.2@120.73,57.5 ; C14.2@108.2,59.3 108.665,59.765 108.665,60.165 109,60.5 114.75,60.5 115.177,60.073 115.177,59.723 115.9,59 119.23,59 J2.2@120.73,57.5
  Bottom Layer w0.254: v3(117,56.25) 118,57.25 v3(119,57.25)
REGIN: C12.2 Q1.2 U1.36 | length 14.3
  Top Layer w0.254: U1.36 106.024,62.024 108.2,64.2 C12.2 108.723,64.773 108.723,64.918 109.055,65.25 116.028,65.25 116.055,65.277 116.227,65.277 Q1.2
SCL: J4.3 R22.1 U1.26 | length 26
  Top Layer w0.254: U1.26 110.727,57.023 111.5,56.25 R22.1 113.278,55.822 113.278,55.222 113.75,54.75 117.25,54.75 118,54 123.23,54 J4.3
SDA: J4.4 R23.1 U1.27 | length 28.1
  Top Layer w0.254: U1.27 111.348,57.523 R23.1@112.85,59.025 ; R23.1 R23.1@112.85,59.025 ; J4.4 126.75,59.588 122.162,55 119.675,55 116.925,57.75 113.75,57.75 113.278,58.222 113.278,58.597 R23.1@112.85,59.025
SRN: C21.1 C23.1 R25.2 U1.20 | length 14.6
  Top Layer w0.254: U1.20 100.249,52.251 101,51.5 102.535,51.5 102.8,51.235 C23.1 102.8,49.95 104.277,48.473 104.277,48.023 C21.1 104.8,47.45 106.5,45.75 R25.2
SRP: C21.2 C23.2 R24.2 U1.18 | length 13
  Top Layer w0.254: U1.18 99.249,51.951 100.627,50.573 100.677,50.573 101.2,50.05 C23.2 101.723,49.477 101.723,49.027 103.2,47.55 C21.2 102.75,47.05 R24.2
TEMP1: R16.2 U1.21 | length 8.4
  Top Layer w0.254: U1.21 100.75,52.75 101.375,52.125 103.775,52.125 105.675,50.225 R16.2
TEMP2: J3.2 U1.23 | length 21.4
  Top Layer w0.254: U1.23 101.75,53.5 102.25,53 109.25,53 111.25,51 116.02,51 J3.2
VC0: C25.1 C26.2 R28.2 U1.16 | length 37.2
  Top Layer w0.254: R28.2 81.65,44.775 82.123,44.302 82.348,44.302 83.9,42.75 99.5,42.75 101.75,45 101.75,48.25 101.25,48.75 99.399,48.75 99.25,48.601 99.25,47.85 C26.2@98.95,47.55 ; U1.16 98.249,50.199 C25.1 98.05,48.45 C26.2@98.95,47.55 ; C26.2 C26.2@98.95,47.55
VC1: C24.1 C25.2 C27.2 R26.2 U1.15 | length 34.1
  Top Layer w0.254: R26.2 82,46.75 84,44.75 94.75,44.75 96.55,46.55 96.55,47.45 97.45,46.55 C27.2 ; C24.1@96.45,47.6 C25.2 96.68,50.23 96.68,50.932 97.749,52.001 U1.15
VC2: C22.1 C24.2 R21.2 U1.14 | length 25.2
  Top Layer w0.254: R21.2 81.65,48.4 84.05,46 93.952,46 94.427,46.475 94.427,46.977 C24.2 94.95,48.8 93.8,49.95 C22.1 93.982,50.182 94.682,50.182 97.249,52.749 U1.14
VC3: C20.1 C22.2 R20.2 U1.13 | length 28.5
  Top Layer w0.254: R20.2 76.257,50.5 v2(77.75,50.5) ; C20.1 92.2,47.85 C22.2 92.25,50.05 92.25,51.5 v2(93,52.25) 95.25,52.25 96.749,53.749 U1.13
  Bottom Layer w0.254: v2(77.75,50.5) 91.25,50.5 v2(93,52.25)
VC4: C19.1 C20.2 R19.2 U1.12 | length 24.4
  Top Layer w0.254: R19.2 81.65,52.025 86.175,47.5 C20.2 90.95,47.55 90.427,48.073 90.377,48.073 89.25,49.2 C19.1 89.482,50.432 90.182,50.432 90.75,51 90.75,52.6 94.673,56.523 U1.12
VC5: C18.1 C19.2 R18.2 U1.11 | length 22.4
  Top Layer w0.254: R18.2 82.964,54.036 84.277,52.723 86.227,52.723 C18.1 87.15,51.8 C19.2 89.682,52.232 89.682,52.682 94.023,57.023 U1.11
VC6: C16.1 C18.2 R15.2 U1.10 | length 16
  Top Layer w0.254: R15.2 83.374,55.875 84.926,54.323 86.227,54.323 C18.2 87.15,54.2 C16.1 90.2,54.2 93.523,57.523 U1.10
VC7: C15.1 C16.2 R13.2 U1.9 | length 20.8
  Top Layer w0.254: R13.2 83.571,57.679 84.988,56.262 C15.1 88.837,56.262 89.3,55.8 91.523,58.023 U1.9
VC8: C11.1 C15.2 R12.2 U1.8 | length 14.5
  Top Layer w0.254: R12.2 85.063,59.5 86.7,57.862 C15.2 86.888,58 87.75,58 88.2,58.45 C11.1 89.323,58.523 U1.8
VC9: C10.1 C11.2 R11.2 U1.7 | length 20
  Top Layer w0.254: R11.2 84.679,61.321 85.675,60.325 C10.1 87.025,60.05 C11.2 90.2,60.05 91.227,59.023 U1.7
VC10: C9.1 C10.2 R9.2 U1.6 | length 16
  Top Layer w0.254: R9.2 85.5,63.125 86.7,61.925 C10.2 86.8,61.925 87.575,62.7 C9.1 89.682,62.268 89.682,61.818 91.976,59.524 U1.6
VC11: C8.1 C9.2 R7.2 U1.5 | length 22
  Top Layer w0.254: R7.2 83.786,64.964 84.363,64.387 C8.1 89.162,64.387 C9.2 89.715,63.835 90.165,63.835 91,63 91,61.5 92.476,60.024 U1.5
VC12: C7.1 C8.2 R6.2 U1.4 | length 18.8
  Top Layer w0.254: R6.2 85.938,66.75 86.7,65.987 C8.2 88.487,65.987 89.2,66.7 C7.1 90.3,66.7 91.75,65.25 91.75,61.75 92.976,60.524 U1.4
VC13: C6.1 C7.2 R5.2 U1.3 | length 24.4
  Top Layer w0.254: R5.2 86.593,68.607 C6.1 89.1,68.45 C7.2 89.482,68.068 90.182,68.068 92.5,65.75 92.5,62 93.476,61.024 U1.3
VC14: C5.1 C6.2 R4.2 U1.2 | length 25.3
  Top Layer w0.254: R4.2 86.425,70.375 C6.2 ; C5.1 87.8,73.05 86.75,72 C6.2 ; U1.2 93.976,61.524 93.25,62.25 93.25,66.75 89.95,70.05 C6.2
VC15: C1.1 C5.2 R3.2 U1.1 | length 35
  Top Layer w0.254: R3.2 84.395,72.25 84.895,71.75 v2(85,71.75) ; v2(88,71.75) 89.45,71.75 C5.2 89.8,71.45 90.323,70.927 90.323,70.677 94,67 94,62.173 94.149,62.024 U1.1 ; C1.1 93.902,73.05 94.102,73.25 v2(94.25,73.25)
  Bottom Layer w0.254: v2(85,71.75) v2(88,71.75) 89.5,73.25 v2(94.25,73.25)
VC16: C1.2 R1.2 U1.48 | length 22.5
  Top Layer w0.254: R1.2@81.671,73.979 R1.2 90.545,74 91.25,73.295 91.25,71.75 91.55,71.45 C1.2 92.823,71.127 92.823,69.177 96.749,65.251 U1.48
WAKE: J5.1 U1.22 | length 17.9
  Top Layer w0.254: U1.22 101.25,53 101.718,52.532 107.718,52.532 112.48,47.77 J5.1
pads on no net: U1.19 U1.28 U1.31 U1.32 U1.44

## Polygon pours and split planes (outlines as drawn)
GND on Bottom Layer "GND_L02_P002" (solid, pour order 2): 129.7,42.775 129.7,83.2 63,83.2 63,42.775
GND on Top Layer "GND_L01_P000" (solid, pour order 0): 63,98.25 129.75,98.25 129.75,28.25 63,28.25

## Keep-outs
Keep-Out Layer:
  the board outline again, w0.254

## Silkscreen, mask and mechanical layers (free items; w line width, h text height)
Top Overlay:
  lines w0.254: 113.4,43.5 116.6,43.5 116.6,49.5 113.4,49.5 113.4,43.5
  text "BAT+" at 67.675,83.733 h3
  text "PACK+" at 120.575,82.869 h3
  text "16P" at 69.772,79.858 h1.1
  text "15P" at 69.772,77.868 h1.1
  text "14P" at 69.772,75.883 h1.1
  text "13P" at 69.772,73.889 h1.1
  text "12P" at 69.772,71.9 h1.1
  text "11P" at 69.772,69.915 h1.1
  text "10P" at 69.772,67.921 h1.1
  text "FUSE" at 123.425,66.333 h1.1
  text "9P" at 70.187,65.927 h1.1
  text "8P" at 70.187,63.933 h1.1
  text "ALERT" at 123.025,63.553 h1.1
  text "SDA" at 123.586,59.608 h1.1
  text "7P" at 69.772,58.928 h1.1
  text "SCL" at 123.794,57.232 h1.1
  text "6P" at 69.775,56.894 h1.1
  text "5P" at 69.773,54.867 h1.1
  text "PGND" at 122.975,54.658 h1.1
  text "4P" at 69.749,52.843 h1.1
  text "GND" at 123.405,52.083 h1.1
  text "3P" at 69.774,50.808 h1.1
  text "2P" at 69.778,48.779 h1.1
  text "TEMP2" at 120.875,47.428 h1.1
  text "1P" at 69.805,46.753 h1.1
  text "WAKE" at 109.15,46.106 h2
  text "GND" at 120.88,44.883 h1.1
  text "1N" at 69.725,44.728 h1.1
  text "PACK-" at 120.4,41.119 h3
  text "BAT-" at 68.225,40.783 h3
Bottom Overlay:
  text "16P" at 71.5,79.683 h1.1
  text "15P" at 71.5,77.693 h1.1
  text "14P" at 71.5,75.708 h1.1
  text "13P" at 71.5,73.714 h1.1
  text "12P" at 71.5,71.725 h1.1
  text "11P" at 71.5,69.74 h1.1
  text "10P" at 71.5,67.746 h1.1
  text "9P" at 71.5,65.783 h1.1
  text "8P" at 71.5,63.908 h1.1
  text "7P" at 71.322,58.853 h1.1
  text "6P" at 71.325,56.819 h1.1
  text "5P" at 71.323,54.792 h1.1
  text "4P" at 71.299,52.768 h1.1
  text "3P" at 71.324,50.733 h1.1
  text "2P" at 71.328,48.704 h1.1
  text "1P" at 71.355,46.678 h1.1
  text "1N" at 71.275,44.653 h1.1

## Text inside footprints (layer, text, board x,y; h text height)
U1: Top Overlay "*" at 93.594,62.02 h1.02; Mechanical 13 "*" at 95.969,61.639 h1.02
U2: Mechanical 13 "TAB" at 108.476,93.133 h1.02 r180
U3: Mechanical 13 "TAB" at 87.774,95.622 h1.02
U4: Mechanical 13 "TAB" at 87.436,85.633 h1.02 r180
U5: Mechanical 13 "TAB" at 109.524,88.367 h1.02